# Altium PCB thermostable_constant_current_source.PcbDoc
Units mm, origin at the board's own origin, x right, y up, seen from the top; angles counter-clockwise.
Board outline 23 x 18 mm, 2 copper layers (Top Layer, Bottom Layer); 7 components, 7 nets, 21 pads, 0 vias.
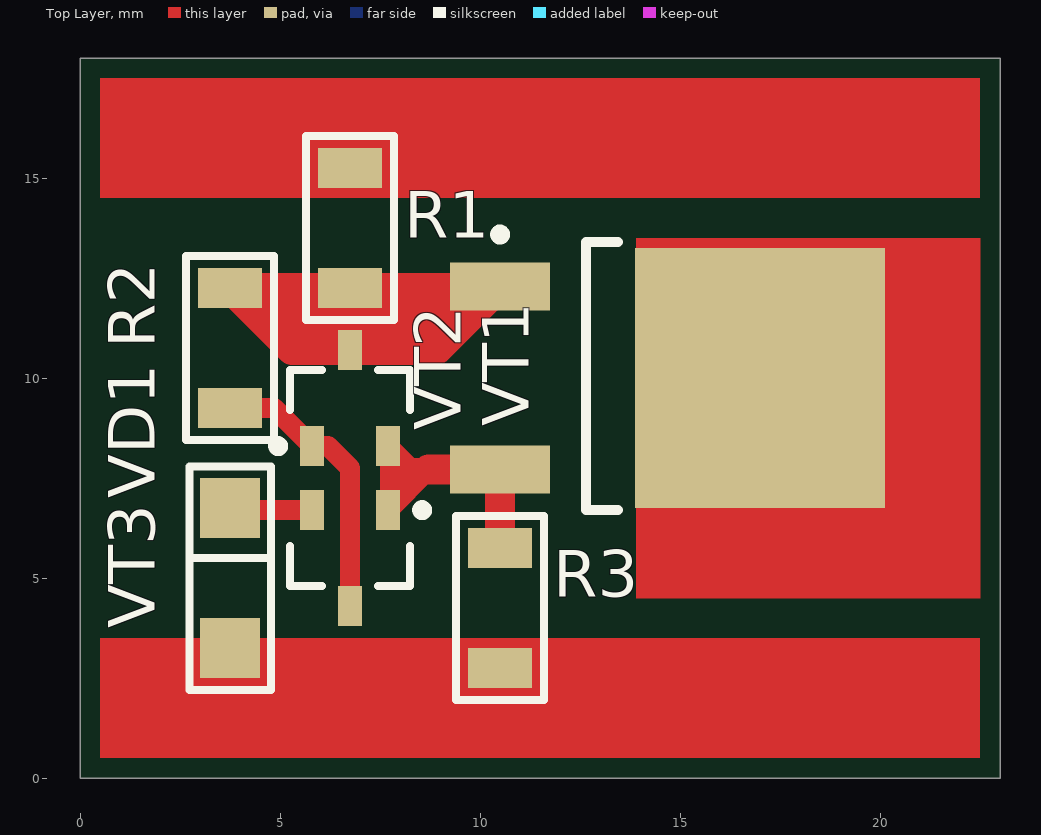
[diagram p0: Top Layer view]
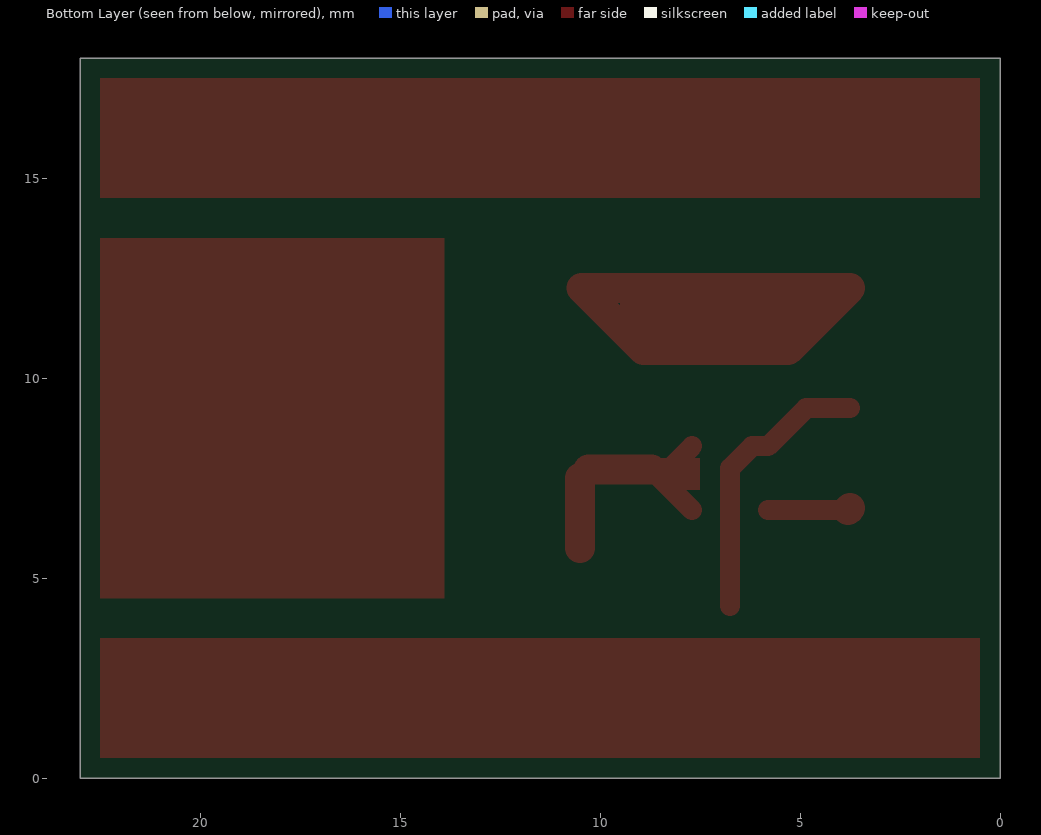
[diagram p1: Bottom Layer view, seen from below]
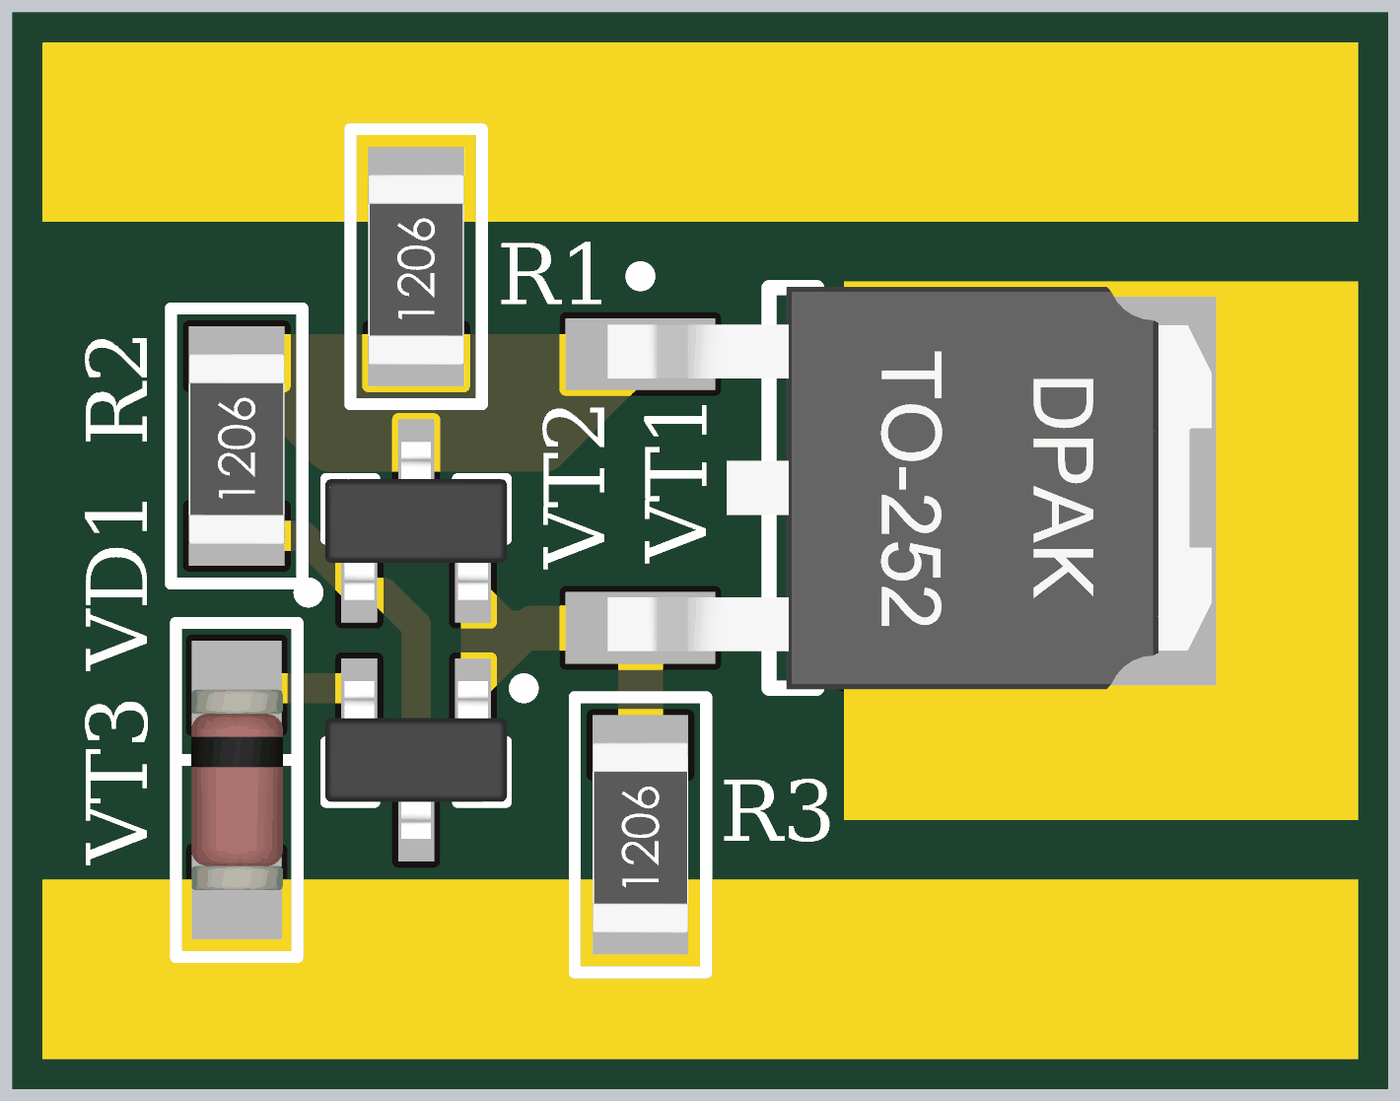
[diagram p2: 3D render of the assembled board from above, using the file's embedded part models]

## Layer stack, top to bottom
Top Solder: solder mask 0.0102, Solder Resist, Dk 3.5
Top Layer: signal copper 0.0356
Dielectric 1: dielectric 0.32, FR-4, Dk 4.8
Bottom Layer: signal copper 0.0356
Bottom Solder: solder mask 0.0102, Solder Resist, Dk 3.5

## Board outline
0,0 0,18 23,18 23,0

## Design rules (kind name [scope] priority, off if disabled: settings)
Clearance [All] p1: gap=0.254 ignorepadtopadclearanceinfootprint=FALSE except(0: Arc-Hole Track-Hole SMDPad-Hole THPad-Hole Via-Hole Fill-Hole Poly-Hole Region-Hole Text-Hole)
Height [All] p1: minheight=0 maxheight=50 prefheight=12.7
PolygonConnect [All] p1: connectstyle=Relief reliefconductorwidth=0.254 reliefentries=4 polygonreliefangle="90 Angle" airgapwidth=0.254
RoutingVias [All] p1: holewidth=0.711 width=1.27 viastyle="Through Hole" minholewidth=0.711 minwidth=1.27 maxholewidth=0.711 maxwidth=1.27
SolderMaskExpansion [All] p1: expansion=0.102 istentingtop=FALSE
Width [All] p1: maxlimit=2 minlimit=0.5 preferedwidth=1
29 further rules are at their usual default settings.

## Components (designator, comment, footprint, x,y, rotation, side; value= is the part's Value field where it differs from the comment)
R1 "10к" CH1206R 6.75,13.75 r90 top
R2 "10к" CH1206R 3.75,10.75 r90 top
R3 "68" CH1206R 10.5,4.25 r90 top
VD1 "BZV55C7V5" SOD80 3.75,5 r90 top
VT1 "*" DPAK 13.75,10 r0 top
VT2 "BC857" SOT23_123 6.75,9.5 r90 top
VT3 "BC847" SOT23_123 6.75,5.5 r270 top

## Footprints (in the part's own frame and the unit in brackets; to place one, negate y for a bottom-side part, rotate by r counter-clockwise, add the part's x,y. Pads: shape width x height; smd on the part's side, far side on the other; paste and mask are expansions set on the pad)
CH1206R [mm] "Chip Resistor, 2-Leads, Body 3,0x1,5mm, IPC Low Density"
  rect 1x1.6 smd: 1(-1.5,0) 2(1.5,0)
  silkscreen extent -2.3,-1.1 2.3,1.1, body extent -1.65,-0.8 1.55,0.8, height 0.47
DPAK [mm] "D-Pak, Body 6,2x6,7mm"
  rect 2.5x1.2 smd: 1(-3.25,2.29) 3(-3.25,-2.29)
  rect 6.25x6.5 smd: 2(3.25,0)
  round 0.5 on Mech1: ""(-3.2,2.9)
  silkscreen extent -3.37,-3.3 -0.3,3.71, body extent -3.8,-3.32 6.3,3.42, height 2.37
SOD80 [mm]
  rect 1.5x1.5 smd: 1(-1.75,0) 2(1.75,0)
  round 0.5 on Mech1: ""(2.3,0.6)
  silkscreen extent -2.79,-1.02 2.79,1.02, body extent -1.68,-0.78 1.68,0.76, height 1.52
SOT23_123 [mm] "SOT23, 3-Leads, Body 3,0x2,6mm (max), Pitch 0,95mm, IPC Medium Density"
  rect 1x0.6 smd: 1(-1.2,0.95) 2(1.2,0) 3(-1.2,-0.95)
  round 0.5 on Mech1: ""(-0.9,1.1)
  silkscreen extent -1.32,-1.5 0.7,1.92, body extent -1.32,-1.52 1.32,1.52, height 1.12

## Part data
R1 R2 R3: library part Resistor
VD1: library part "Diod Zener"
VT1: library part N-chanel, "Mosfet"
VT2: library part PNP, "Bipolar"
VT3: library part NPN, "Bipolar"

## Nets (pads, with @x,y where several pads share a name; then routed paths per layer and width w, separated by ;. In a path a pad name is that pad's centre, name@x,y a point inside that pad or via, vN(x,y) a via of type N, cw(c..) or ccw(c..) an arc to the next point about the centre after c; other vN are vias at no path point)
GND: R3.1 VD1.1
LOAD+: R1.2
LOAD-: VT1.2
NetR1_1: R1.1 R2.2 VT1.1 VT2.2 | length 14.7
  Top Layer w0.75: R2.2 5.3,10.7 VT2.2 8.91,10.7 10.46,12.25 R1.1 R2.2
NetR2_1: R2.1 VT2.1 VT3.2 | length 7.1
  Top Layer w0.5: R2.1 4.85,9.25 VT2.1 6.2,8.3 6.75,7.75 VT3.2
NetR3_2: R3.2 VT1.3 VT2.3 VT3.1 | length 6.3
  Top Layer w0.5: VT3.1 8.71,7.71 8.29,7.71 VT2.3 ; VT1.3@10.29,7.71 VT1.3@10.5,7.5
  Top Layer w0.75: 8.71,7.71 VT1.3@10.29,7.71 ; R3.2 VT1.3@10.5,7.5
NetVD1_2: VD1.2 VT3.3 | length 2.1
  Top Layer w0.5: VD1.2@3.8,6.7 VT3.3
  Top Layer w0.75: VD1.2 VD1.2@3.8,6.7
pads on no net: VD1. VT1. VT2. VT3.

## Other copper
Top Layer:
  rectangle net NetR3_2: 7.5,7.2 8.5,8
  rectangle net NetR1_1: 4.5,11 9.5,12.25
  rectangle net LOAD+: 0.5,14.5 22.5,17.5
  rectangle net GND: 0.5,0.5 22.5,3.5
  region net LOAD-: 22.5,4.5 13.9,4.5 13.9,13.5 22.5,13.5

## Silkscreen, mask and mechanical layers (free items; w line width, h text height)
Top Solder:
  rectangle: 0.5,14.5 22.5,17.5
  rectangle: 0.5,0.5 22.5,3.5
  region: 22.5,4.5 13.9,4.5 13.9,13.5 22.5,13.5
Size:
  lines w0.254: 0,0 0,18 23,18 23,13.75 23,4.25 23,0 0,0